# Altium PCB Copy of PDC_Rev_2.PcbDoc (part 3 of 3)
Units mil, origin at the board's own origin, x right, y up, seen from the top; angles counter-clockwise.
Board outline 5005 x 4200 mil, 4 copper layers (Top Layer, Signal_1, Signal_2, Bottom Layer), stack 23.756 mil thick; 184 components, 175 nets, 851 pads, 949 vias.
Unrouted connection lines stored in the file: 344.
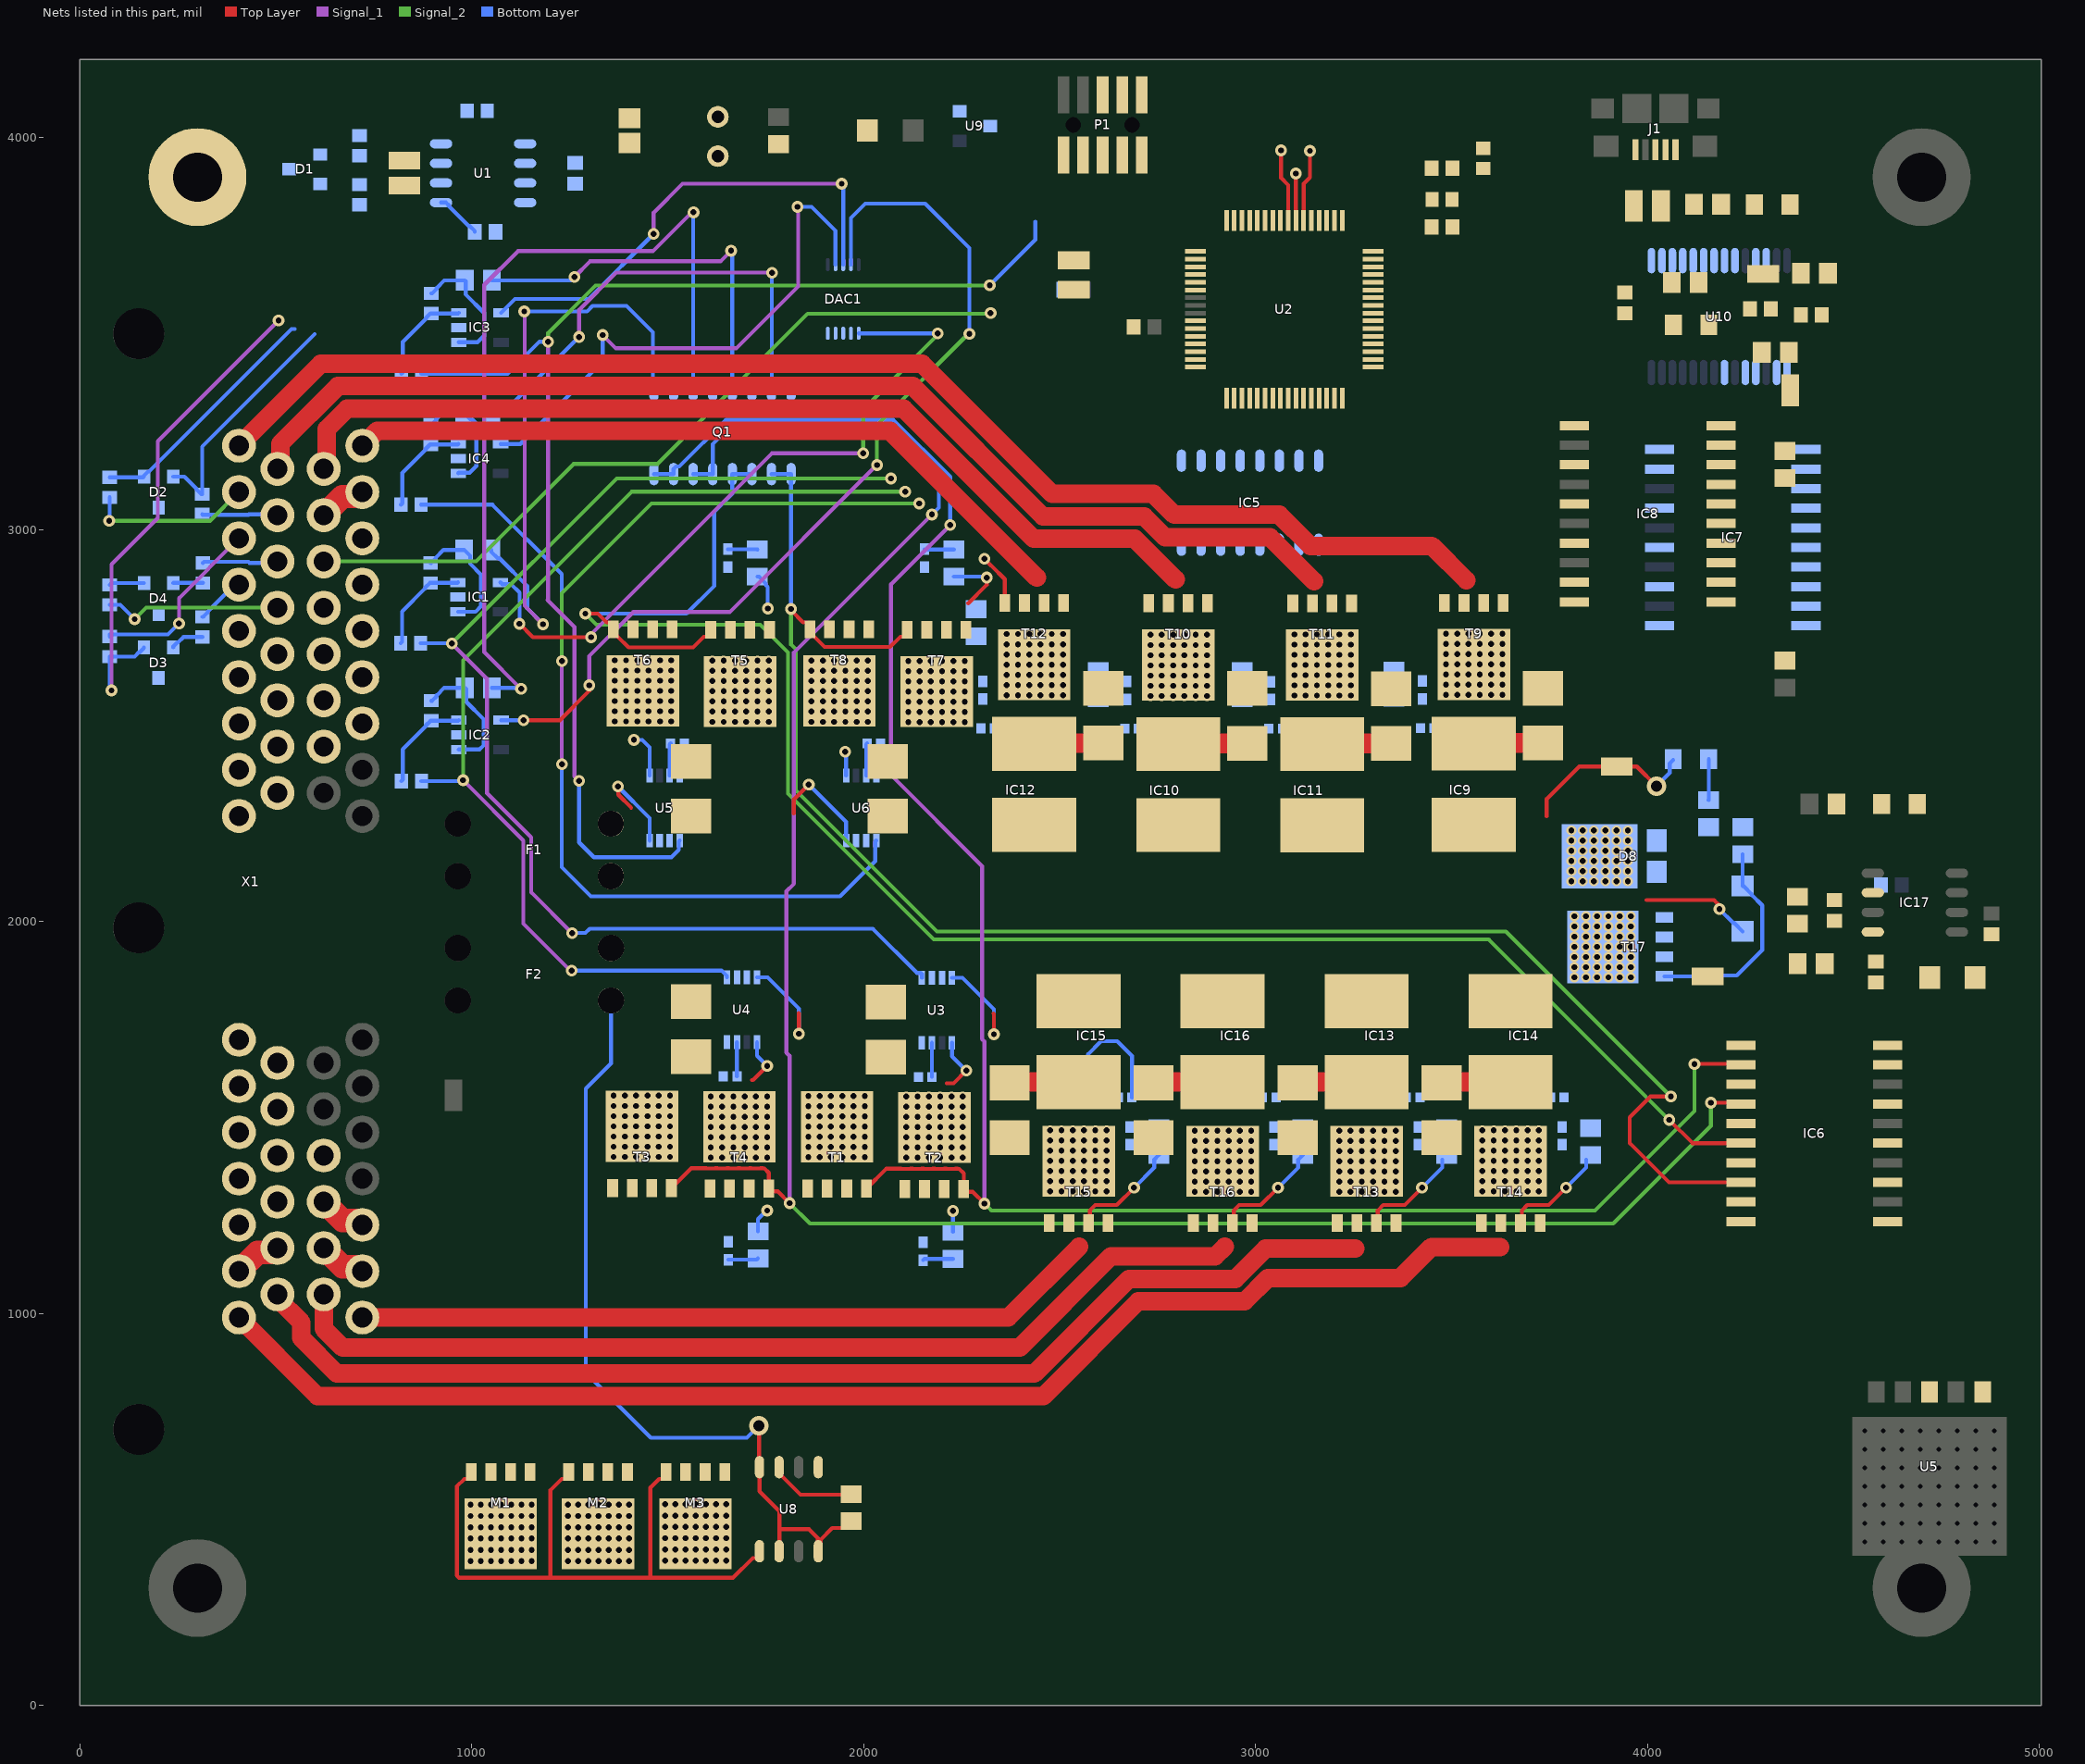
[diagram p4: the nets of this part, all layers, seen from the top]

## Via types
v1: diameter 25, hole 15, Top Layer to Bottom Layer, 876 vias
v2: diameter 30, hole 15, Top Layer to Bottom Layer, 71 vias
v3: diameter 50, hole 28, Top Layer to Bottom Layer, 2 vias

## Nets (pads, with @x,y where several pads share a name; then routed paths per layer and width w, separated by ;. In a path a pad name is that pad's centre, name@x,y a point inside that pad or via, vN(x,y) a via of type N, cw(c..) or ccw(c..) an arc to the next point about the centre after c; other vN are vias at no path point) (continued)
+12: "PTC Fuse1.2" "PTC Fuse2.2" "PTC Fuse3.2" "PTC Fuse4.2" "PTC Fuse5.2" "PTC Fuse6.2" "PTC Fuse7.2" "PTC Fuse8.2" C21.2 D5.1 D7.2 D8.3 F1.1 F2.1 IC6.11 IC6.13 IC6.15 IC6.17 IC6.19 IC6.20 IC7.11 IC7.13 IC7.15 IC7.17 IC7.19 IC7.20 IC8.11 IC8.13 IC8.15 IC8.17 IC8.19 IC8.20 IC17.2 LED2.1 PWR_OUT.1 R25.2 R28.2 R31.2 R34.2 R61.2 R64.1 T17.mb U3.8 U4.8 U5.8 U6.8 U8.4 U8.6 U8.8 | length 3888.1
  Top Layer w10: v2(1373,2345) 1374.21,2343.79 1374.21,2323.79 1407,2291 ; v3(1733,714) 1733,609.63 U8.4@1734.34,608.28 1734.34,546.66 1785,496 1785,450 ; U8.6@1784.34,393.72 1785,394.37 1785,450 ; 1822,2276 1822,2312 v2(1860,2350) ; 1834,1767 1835,1766 v2(1835,1714) ; R64.1@1968.34,470.55 1964.41,470.55 1946.77,452.91 1919.91,452.91 1890.64,423.64 1890.64,407.46 1884.34,401.17 U8.8@1884.34,393.72 1883.25,394.81 1883.25,427.27 1860.52,450 1785,450 ; 2331.48,1765.7 2332.48,1764.7 v2(2332.48,1712.7) ; 3743,2269 3743,2313 3826,2396 PWR_OUT.1@3922,2396 3973,2396 v3(4023,2346) ; 3998,2055 4170,2055 4184.36,2040.64 4184.36,2032.36 v2(4184,2032)
  Bottom Layer w10: F2.1@1355.28,1799.16 1355.28,1638.28 1291,1574 1291,849 1457,683 1702,683 v3(1733,714) ; v2(1373,2345) 1453.82,2264.18 U5.8@1453.82,2207.11 ; U4.8@1727.91,1858.19 1754.81,1858.19 1835,1778 v2(1835,1714) ; v2(1860,2350) 1955.26,2254.74 U6.8@1955.26,2207.11 ; U3.8@2225.39,1856.89 2252.28,1856.89 2332.48,1776.7 v2(2332.48,1712.7) ; v3(4023,2346) 4056.96,2379.96 4056.96,2403.71 LED2.1@4065.91,2412.65 ; v2(4184,2032) 4219.16,1996.84 4221.61,1996.84 D7.2@4243.18,1975.26
  other v1: 3814,1858 3842.8,1858 3871.6,1858 3900.4,1858 3929.2,1858 3958,1858 3814,1884 3842.8,1884 3871.6,1884 3900.4,1884 3929.2,1884 3958,1884 3814,1910 3842.8,1910 3871.6,1910 3900.4,1910 3929.2,1910 3958,1910 3814,1936 3842.8,1936 3871.6,1936 3900.4,1936 3929.2,1936 3958,1936 3814,1962 3842.8,1962 3871.6,1962 3900.4,1962 3929.2,1962 3958,1962 3814,1988 3842.8,1988 3871.6,1988 3900.4,1988 3929.2,1988 3958,1988 3814,2014 3842.8,2014 3871.6,2014 3900.4,2014 3929.2,2014 3958,2014 3806,2103 3834.8,2103 3863.6,2103 3892.4,2103 3921.2,2103 3950,2103 3806,2129 3834.8,2129 3863.6,2129 3892.4,2129 3921.2,2129 3950,2129 3806,2155 3834.8,2155 3863.6,2155 3892.4,2155 3921.2,2155 3950,2155 3806,2181 3834.8,2181 3863.6,2181 3892.4,2181 3921.2,2181 3950,2181 3806,2207 3834.8,2207 3863.6,2207 3892.4,2207 3921.2,2207 3950,2207 3806,2233 3834.8,2233 3863.6,2233 3892.4,2233 3921.2,2233 3950,2233
BAT_SENSE: R61.1 R62.2 U2.3
CAN_N: D1.2 R13.1 TEST_CANN1.1 U1.6 X1.A31
CAN_P: D1.1 R14.2 TEST_CANP1.1 U1.7 X1.A30
CS: DAC1.10 U2.34
D_IN_1: R18.2 X1.A29 | length 128.3
  Bottom Layer w10: R18.2@313,2777.59 314.97,2777.59 326.7,2789.32 326.7,2791.29 395.65,2860.24 X1.A29@405.91,2860.24
D_IN_2: R20.2 X1.A21 | length 455.5
  Signal_2 w10: v2(140,2772) 169.18,2801.18 X1.A21@504.33,2801.18
  Bottom Layer w10: R20.2@76,2808.41 103.59,2808.41 v2(140,2772)
D_IN_3: R17.2 X1.A20 | length 194.3
  Bottom Layer w10: R17.2@314,2915.59 316.95,2918.54 430.06,2918.54 433.01,2915.59 500.63,2915.59 X1.A20@504.33,2919.29
D_N: J1.2 TEST_USBD_N1.1 U10.16
D_OUT_1: D2.1 R22.1 U2.57 | length 630.5
  Bottom Layer w10: R22.1@76,3134 161.99,3134 D2.1@163.77,3135.78 163.77,3137.75 174.51,3148.5 176.48,3148.5 540.35,3512.36 548.64,3512.36
D_OUT_2: D2.2 R19.1 U2.59 | length 620.6
  Bottom Layer w10: D2.2@238.57,3135.78 266.81,3135.78 298.3,3104.29 298.3,3102.32 310.03,3090.59 R19.1@312,3090.59 312,3212 599,3499
D_OUT_3: D3.1 R21.1 U2.60 | length 1307.8
  Signal_1 w10: v2(81,2590) 81,2912 199,3030 199,3226 v2(507,3534)
  Bottom Layer w10: v2(81,2590) 75.83,2595.17 R21.1@75.83,2676.41 139.82,2676.41 150.88,2687.47 152.85,2687.47 163.6,2698.22 D3.1@163.6,2700.19
D_OUT_4: D3.2 R18.1 | length 86.6
  Bottom Layer w10: D3.2@238.4,2700.19 238.4,2702.16 249.15,2712.9 251.12,2712.9 264.62,2726.41 R18.1@313,2726.41
D_OUT_5: D4.1 R20.1 | length 89.5
  Bottom Layer w10: R20.1@76,2859.59 80.15,2863.74 D4.1@163.77,2863.74
D_OUT_6: D4.2 R17.1 | length 75.7
  Bottom Layer w10: D4.2@238.57,2863.74 239.24,2864.41 R17.1@314,2864.41
D_P: J1.3 TEST_USBD_P1.1 U10.15
DGND: C1.1 C2.1 C3.1 C4.1 C5.1 C6.1 C7.1 C8.1 C9.1 C10.1 C11.1 C12.1 C13.1 C14.1 C15.1 C16.1 C17.1 C18.1 C19.1 C20.1 C21.1 C22.1 C23.1 C25.1 C26.1 D1.3 D2.3 D3.3 D4.3 D8.1 D8.2 DAC1.7 IC1.2 IC2.2 IC3.2 IC4.2 IC6.1 IC6.10 IC7.1 IC7.10 IC8.1 IC8.10 IC9.4 IC9.7 IC10.4 IC10.7 IC11.4 IC11.7 IC12.4 IC12.7 IC13.4 IC13.7 IC14.4 IC14.7 IC15.4 IC15.7 IC16.4 IC16.7 IC17.4 J1.5 LED1.2 P1.3 P1.5 pad.1@300,3900 Q1.10 Q1.12 Q1.14 Q1.16 R15.1 R27.1 R30.1 R33.1 R36.1 R39.1 R42.1 R45.1 R48.1 R51.1 R54.1 R57.1 R60.1 R62.1 R66.1 R67.1 T17.1 T17.2 T17.3 U1.2 U2.10 U2.40 U3.4 U3.6 U3.7 U4.4 U4.6 U4.7 U5.3@4719.87,800.39 U5.4@1530.59,2372.89 U5.6@1505,2207.11 U5.7 U6.4 U6.6 U6.7 U8.1 U9.3 U10.7 U10.18 U10.21 U10.25 U10.26 W1.1 X1.A5 X1.A6 X1.A7 X1.A13 X1.A14 X1.A15 X1.A16 X1.A22 X1.A23 X1.A24 X1.A25 X1.A32 X1.A33 X1.A34 X1.B10 X1.B14 X1.B15 X1.B16 X1.B20 X1.B21 X1.B22 X1.B23
DVCC: C3.2 C5.2 C25.2 P1.1 R23.2 R24.2 U2.41 U10.4 U10.19 U10.20
DVCC_5V: J1.1 R70.2 R71.2
EMERGENCY_SHUTDOWN: R?.2 X1.A12 | length 1964
  Signal_2 w10: X1.A12@622.44,2919.29 1011.29,2919.29 1260,3168 1474,3168 1857,3551 2322,3551 v2(2324,3553)
FTDI_GREEN: D9.2 U10.23
FTDI_RED: D10.2 U10.22
FTDI_RX: R69.2 U2.47
FTDI_TX: R68.2 U2.48
HC1_ANALOG_BACKUP_REF: DAC1.2 IC4.4 | length 1406.1
  Signal_1 w10: v2(1334,3497) 1368,3463 1675,3463 1833,3621 1833,3822 v2(1831,3824)
  Bottom Layer w10: IC4.4@1074,3219 1124,3219 1334,3429 v2(1334,3497) ; v2(1831,3824) 1867,3824 1928.31,3762.69 DAC1.2@1928.31,3676.6
HC1_EN: IC5.16 U2.24
HC1_GATE: IC6.18 Q1.1 Q1.2 T7.4 T8.4 | length 4309.3
  Top Layer w10: v2(1815,2798) 1815,2794.26 1845.32,2763.94 1854.18,2763.94 1862.96,2755.16 T8.4@1862.96,2746.3 1862.96,2737.44 1871.74,2728.66 1872.97,2728.66 1900.63,2701 2067.36,2701 2093.72,2727.36 2102.58,2727.36 2111.36,2736.14 T7.4@2111.36,2745 ; v2(4060,1554) 4008,1554 3955,1501 3955,1435 4055,1335 IC6.18@4238.99,1335
  Signal_2 w10: v2(1815,2798) 1815,2707.28 1827,2695.28 1827,2335.28 2187.28,1975 3639,1975 v2(4060,1554)
  Bottom Layer w10: Q1.2@1765,3142.07 Q1.1@1815,3142.07 v2(1815,2798)
HC1_ISENSE_ADC: R12.1 U2.46 U6.5 | length 3281.6
  Signal_1 w10: v2(1230,2402) v2(1230,2665)
  Signal_2 w10: v2(1230,2665) 1230,2838 1459,3067 v2(2142,3067)
  Bottom Layer w10: R12.1@870.46,3064 1053,3064 1230,2887 v2(1230,2665) ; v2(1230,2402) 1230,2139 1304,2065 1940,2065 2029.7,2154.7 2029.7,2204.78 U6.5@2032.03,2207.11
HC1_VSENSE_ADC: R35.1 R36.2 U2.43 | length 75.7
  Bottom Layer w10: R36.2@2155.15,2950.28 2155.97,2949.45 R35.1@2230.5,2949.45
HC2_ANALOG_BACKUP_REF: DAC1.3 IC3.4 | length 1245.1
  Signal_1 w10: v2(1464,3755) 1464,3809 1538,3883 v2(1944,3883)
  Bottom Layer w10: IC3.4@1075.13,3553.4 1110.73,3589 1298,3589 v2(1464,3755) ; v2(1944,3883) 1948,3879 DAC1.3@1948,3676.6
HC2_EN: IC5.14 U2.23
HC2_GATE: IC6.16 Q1.3 Q1.4 T5.4 T6.4 | length 4821.8
  Top Layer w10: v2(1290,2786) 1321.82,2786 1343.89,2763.94 1352.74,2763.94 1361.52,2755.16 T6.4@1361.52,2746.3 1361.52,2737.44 1370.3,2728.66 1371.53,2728.66 1400.19,2700 1564.92,2700 1592.28,2727.36 1601.14,2727.36 1609.92,2736.14 T5.4@1609.92,2745 ; v2(4055.5,1494.5) 4115,1435 IC6.16@4238.99,1435
  Signal_2 w10: v2(1290,2786) 1318,2758 1736,2758 1807,2687 1807,2327 2179,1955 3595,1955 v2(4055.5,1494.5)
  Bottom Layer w10: v2(1290,2786) 1548,2786 1619,2857 1619,3046 1665,3092 Q1.4@1665,3142.07 Q1.3@1715,3142.07
HC2_ISENSE_ADC: R9.1 U2.52 U5.5@1530.59,2207.11 | length 3385.2
  Signal_1 w10: v2(1195,3480) 1195,2823 1193,2821 1262,2752 1262,2371 v2(1274,2359)
  Signal_2 w10: v2(1195,3480) 1195,3502 1316,3623 v2@2323,3623 ; v2(2322,3624) v2@2323,3623 ; v2@2325,3623 v2@2323,3623
  Bottom Layer w10: R9.1@871.59,3398.4 1091.4,3398.4 1173,3480 v2(1195,3480) ; v2(1274,2359) 1274,2202.28 1311.68,2164.61 1509.48,2164.61 1528.27,2183.39 1528.27,2204.78 U5.5@1530.59,2207.11 ; v2(2322,3624) 2438,3740 2438,3786
HC2_VSENSE_ADC: R32.1 R33.2 U2.42 | length 75.7
  Bottom Layer w10: R33.2@1653.71,2950.28 1728.24,2950.28 R32.1@1729.07,2949.45
HC3_ANALOG_BACKUP_REF: DAC1.4 IC2.4 | length 2417.4
  Top Layer w10: v2(1132,2514) 1225,2514 1299.75,2588.75 v2(1299.75,2603)
  Signal_1 w10: v2(1299.75,2603) 1299.75,2677.75 1412,2790 1658,2790 2033,3165 v2(2034,3165)
  Signal_2 w10: v2(2034,3165) 2034,3267 2267,3500 v2(2270,3500)
  Bottom Layer w10: IC2.4@1075.13,2514 v2(1132,2514) ; DAC1.4@1967.68,3676.6 1967.68,3795.69 2004,3832 2157,3832 2270,3719 v2(2270,3500)
HC3_EN: IC5.12 U2.22
HC3_GATE: IC6.14 Q1.5 Q1.6 T3.4 T4.4 | length 5765.8
  Top Layer w10: T3.4@1509.6,1320.3 1560.23,1370.93 1598.18,1370.93 1598.61,1370.5 1621.39,1370.5 1621.82,1370.93 1626.98,1370.93 1627.41,1370.5 1650.19,1370.5 1650.62,1370.93 1655.78,1370.93 1656.21,1370.5 1678.99,1370.5 1679.42,1370.93 1684.58,1370.93 1685.01,1370.5 1707.79,1370.5 1708.22,1370.93 1713.38,1370.93 1713.81,1370.5 1736.59,1370.5 1737.02,1370.93 1742.18,1370.93 1742.61,1370.5 1746.74,1370.5 1758,1359.24 T4.4@1758,1319 1764.92,1312.08 1780.92,1312.08 v2(1811,1282) ; v2(4162,1538) 4235.99,1538 IC6.14@4238.99,1535
  Signal_1 w10: v2(1811,1282) 1811,1658 1803,1666 1803,2078 1822,2097 1822,2686.8 v2(2174.2,3039)
  Signal_2 w10: v2(1811,1282) 1863,1230 3913,1230 4162,1479 v2(4162,1538)
  Bottom Layer w10: Q1.6@1565,3142.07 Q1.5@1615,3142.07 1615,3218.43 1648.28,3251.72 2050.28,3251.72 2192,3110 2192,3056.8 v2(2174.2,3039)
HC3_ISENSE_ADC: R6.1 U2.51 U4.5 | length 2727
  Signal_1 w10: v2(978,2361) 1132,2207 1132,1995 1252,1875 v2(1255,1875)
  Signal_2 w10: v2(978,2361) 978,2667 1408,3097 v2(2106,3097)
  Bottom Layer w10: R6.1@871.59,2359 976,2359 v2(978,2361) ; v2(1255,1875) 1637.87,1875 1651.14,1861.73 U4.5@1651.14,1858.19
HC3_VSENSE_ADC: R29.1 R30.2 U2.55 | length 197.2
  Top Layer w10: U2.55@3103.15,3789.02 v2(3103.15,3909)
  Bottom Layer w10: R30.2@1654.52,1137.66 1727.27,1137.66 R29.1@1730.46,1140.85
HC4_ANALOG_BACKUP_REF: DAC1.6 IC1.4 | length 1817.4
  Top Layer w10: v2(1122,2760) 1156,2726 v2(1305,2726)
  Signal_1 w10: v2(1305,2726) 1305,2734 1766,3195 v2(1999,3195)
  Signal_2 w10: v2(1999,3195) 1999,3307 2191,3499 v2(2189,3501)
  Bottom Layer w10: IC1.4@1073.27,2865.8 1078.16,2860.91 1101.09,2860.91 1122,2840 v2(1122,2760) ; DAC1.6@1987.61,3501.4 1988.01,3501 v2(2189,3501)
HC4_EN: IC5.10 U2.19
HC4_GATE: IC6.12 Q1.7 Q1.8 T1.4 T2.4 | length 5445.1
  Top Layer w10: T1.4@2007.08,1319 2057.71,1369.63 2095.66,1369.63 2096.09,1369.2 2118.87,1369.2 2119.3,1369.63 2124.46,1369.63 2124.89,1369.2 2147.67,1369.2 2148.1,1369.63 2153.26,1369.63 2153.69,1369.2 2176.47,1369.2 2176.9,1369.63 2182.06,1369.63 2182.49,1369.2 2205.27,1369.2 2205.7,1369.63 2210.86,1369.63 2211.29,1369.2 2234.07,1369.2 2234.5,1369.63 2239.66,1369.63 2240.09,1369.2 2244.21,1369.2 2255.48,1357.94 T2.4@2255.48,1317.7 2262.4,1310.78 2278.4,1310.78 v2(2308.48,1280.7) ; v2(4120,1637) 4236.99,1637 IC6.12@4238.99,1635
  Signal_1 w10: v2(2221,3012) 2070,2861 2070,2374 2302.48,2141.52 2302.48,1700.27 2308.48,1694.27 v2(2308.48,1280.7)
  Signal_2 w10: v2(2308.48,1280.7) 2326.18,1263 3866.43,1263 4120,1516.57 v2(4120,1637)
  Bottom Layer w10: Q1.8@1465,3142.07 Q1.7@1515,3142.07 1515,3155.11 1521.29,3161.41 1529.69,3161.41 1648.28,3280 2076,3280 2221,3135 v2(2221,3012)
HC4_ISENSE_ADC: R3.1 U2.45 U3.5 | length 3195.6
  Signal_1 w10: v2(949,2710) 1039,2620 1039,2328.28 1152,2215.28 1152,2075 v2(1256,1971)
  Signal_2 w10: v2(949,2710) 1370,3131 v2(2070,3131)
  Bottom Layer w10: R3.1@869.72,2710.8 948.2,2710.8 v2(949,2710) ; v2(1256,1971) 1256.14,1971.14 1290.14,1971.14 1301,1982 2023.51,1982 2136.11,1869.39 2145.35,1869.39 2148.61,1866.13 U3.5@2148.61,1856.89
HC4_VSENSE_ADC: R26.1 R27.2 U2.56 | length 263.9
  Top Layer w10: v2(3065,3968) 3065,3898 3083.46,3879.54 U2.56@3083.46,3789.02
  Bottom Layer w10: R27.2@2152,1136.36 2155.19,1139.55 R26.1@2227.93,1139.55
HC_1_OUTPUT: R35.2 T7.1 T7.2 T7.3 T8.1 T8.2 T8.3 X1.A2 X1.A11 | length 292.5
  Top Layer w10: 2267,2812.42 2314,2859.42 v2(2314,2878)
  Top Layer w60: X1.A11@622.44,3037.4 669.95,3084.91 709.32,3084.91 X1.A2@720.87,3096.46
  Bottom Layer w10: R35.2@2230.5,2880.55 2311.45,2880.55 v2(2314,2878)
HC_2_OUTPUT: R32.2 T5.1 T5.2 T5.3 T6.1 T6.2 T6.3 X1.A3 X1.A4 | length 94.5
  Bottom Layer w10: R32.2@1729.07,2880.55 1733,2880.55 1750.64,2862.91 1750.64,2858.98 1755.35,2854.27 v2(1755.35,2799.25)
HC_3_OUTPUT: R29.2 T3.1 T3.2 T3.3 T4.1 T4.2 T4.3 X1.B5 X1.B11 | length 187.3
  Top Layer w60: X1.B11@622.44,1285.43 669.95,1237.92 709.32,1237.92 X1.B5@720.87,1226.38
  Bottom Layer w10: R29.2@1730.46,1209.75 1730.14,1210.06 1730.14,1241.14 1752,1263 v2(1754,1263)
HC_4_OUTPUT: R26.2 T1.1 T1.2 T1.3 T2.1 T2.2 T2.3 X1.B6 X1.B12 | length 176.4
  Top Layer w60: X1.B12@622.44,1167.32 669.95,1119.81 709.32,1119.81 X1.B6@720.87,1108.27
  Bottom Layer w10: R26.2@2227.93,1208.45 v2(2227.93,1262)
JTAG_RST: C23.2 C24.2 D6.1 P1.10 R24.1 R65.1 U2.63 W1.2
JTAG_TCLK: P1.4 U2.62
JTAG_TDI: P1.8 U2.61
JTAG_TDO: P1.6 U2.58
JTAG_TMS: P1.2 R23.1 U2.64
LC1_EN: IC8.3 U2.16
LC1_GATE: IC8.18 T16.4
LC2_EN: IC8.5 U2.15
LC2_GATE: IC8.16 T15.4
LC3_EN: IC8.7 U2.14
LC3_GATE: IC8.14 T14.4
LC4_EN: IC8.9 U2.13
LC4_GATE: IC8.12 T13.4
LC5_EN: IC7.3 U2.12
LC5_GATE: IC7.18 T12.4 | length 134.9
  Top Layer w10: v2(2308,2926) 2326,2908 2326.43,2908 2360.27,2874.16 T12.4@2360.27,2813
LC6_EN: IC7.5 U2.11
LC6_GATE: IC7.16 T11.4
LC7_EN: IC7.7 U2.2
LC7_GATE: IC7.14 T10.4
LC8_EN: IC7.9 U2.1
LC8_GATE: IC7.12 T9.4
LC_1_ISENSE_ADC: IC16.5 U2.49
LC_1_OUTPUT: R59.2 T16.1 T16.2 T16.3 X1.B13 | length 2793.5
  Top Layer w10: T16.3@2941.22,1231.47 2944.67,1234.92 2944.67,1263.25 2958.42,1277 3013.27,1277 v2(3057.42,1321.15)
  Top Layer w47.24: X1.B13@622.44,1049.21 622.44,961.62 670.83,913.23 2398.03,913.23 2630.8,1146 2897,1146 2922,1171
  Bottom Layer w10: v2(3057.42,1321.15) 3109.04,1372.77 3109.04,1392.97 R59.2@3120.62,1404.55
LC_1_VSENSE_ADC: R59.1 R60.2 U2.25
LC_2_ISENSE_ADC: IC15.5 U2.38
LC_2_OUTPUT: R56.2 T15.1 T15.2 T15.3 X1.B7 | length 2183.6
  Top Layer w10: T15.3@2573.8,1231.47 2577.25,1234.92 2577.25,1263.25 2591,1277 2645.85,1277 v2(2690,1321.15)
  Top Layer w47.24: X1.B7@720.87,990.16 2369.18,990.16 2550.02,1171
  Bottom Layer w10: v2(2690,1321.15) 2741.62,1372.77 2741.62,1392.97 R56.2@2753.2,1404.55
LC_2_VSENSE_ADC: R56.1 R57.2 U2.21
LC_3_ISENSE_ADC: IC14.5 U2.37
LC_3_OUTPUT: R53.2 T14.1 T14.2 T14.3 X1.B26 | length 3721.8
  Top Layer w10: T14.3@3676.06,1231.47 3679.51,1234.92 3679.51,1263.25 3693.26,1277 3748.11,1277 v2(3792.26,1321.15)
  Top Layer w47.24: X1.B26@405.91,990.16 606.31,789.76 2459.24,789.76 2701,1031.51 2972.47,1031.51 3031.96,1091 3370,1091 3449,1170 3624,1170
  Bottom Layer w10: v2(3792.26,1321.15) 3843.88,1372.77 R53.2@3843.88,1392.97
LC_3_VSENSE_ADC: R53.1 R54.2 U2.20
LC_4_ISENSE_ADC: IC13.5 U2.54 | length 184.7
  Top Layer w10: U2.54@3122.83,3789.02 3122.83,3882.83 3139,3899 v2(3139,3967)
LC_4_OUTPUT: R50.2 T13.1 T13.2 T13.3 X1.B19 | length 3259.3
  Top Layer w10: T13.3@3308.64,1231.47 3312.09,1234.92 3312.09,1263.25 3325.84,1277 3380.69,1277 v2(3424.84,1321.15)
  Top Layer w47.24: X1.B19@504.33,1049.21 504.33,1038.56 565.2,977.69 565.2,937.91 656.1,847 2435.53,847 2677.29,1088.76 2948.76,1088.76 3026,1166 3255,1166
  Bottom Layer w10: v2(3424.84,1321.15) 3476.46,1372.77 R50.2@3476.46,1392.97
LC_4_VSENSE_ADC: R50.1 R51.2 U2.30
LC_5_ISENSE_ADC: IC12.5 U2.36
LC_5_OUTPUT: R47.2 T12.1 T12.2 T12.3 X1.A1 | length 1891.7
  Top Layer w47.24: X1.A1@720.87,3214.57 758.3,3252 2067.73,3252 2442,2877.73
LC_5_VSENSE_ADC: R47.1 R48.2 U2.29
LC_6_ISENSE_ADC: IC11.5 U2.53
LC_6_OUTPUT: R44.2 T11.1 T11.2 T11.3 X1.A18 | length 2971.4
  Top Layer w47.24: X1.A18@504.33,3155.51 511.86,3163.04 511.86,3219.82 658.53,3366.49 2125.47,3366.49 2457.71,3034.24 2715.71,3034.24 2768.96,2981 3037,2981 3149,2869
LC_6_VSENSE_ADC: R44.1 R45.2 U2.28
LC_7_ISENSE_ADC: IC10.5 U2.31
LC_7_OUTPUT: R41.2 T10.1 T10.2 T10.3 X1.A10 | length 2473
  Top Layer w47.24: X1.A10@622.44,3155.51 629.97,3163.04 629.97,3256.97 682.24,3309.24 2101.76,3309.24 2434,2977 2692,2977 2796,2873
LC_7_VSENSE_ADC: R41.1 R42.2 U2.27
LC_8_ISENSE_ADC: IC9.5 U2.26
LC_8_OUTPUT: R38.2 T9.1 T9.2 T9.3 X1.A26 | length 3447.7
  Top Layer w47.24: X1.A26@405.91,3214.57 615.07,3423.73 2149.18,3423.73 2481.42,3091.49 2739.42,3091.49 2792.67,3038.24 3060.71,3038.24 3139.96,2959 3450,2959 3538,2871
LC_8_VSENSE_ADC: R38.1 R39.2 U2.50
MOSI: DAC1.8 U2.33
NetC7_2: C7.2 U3.3 | length 87.2
  Bottom Layer w10: U3.3@2174.2,1691.11 2174.2,1604.12 C7.2@2174.32,1604
NetC8_2: C8.2 U4.3 | length 87.2
  Bottom Layer w10: U4.3@1676.73,1692.41 1676.73,1605.42 C8.2@1676.85,1605.3
NetC9_2: C9.2 U5.3@1505,2372.89 | length 83.2
  Bottom Layer w10: U5.3@1505,2372.89 1505,2452.32 C9.2@1507.68,2455
NetC10_2: C10.2 U6.3 | length 83.2
  Bottom Layer w10: U6.3@2006.44,2372.89 2006.44,2452.32 C10.2@2009.11,2455
NetC11_2: C11.2 IC9.3
NetC12_2: C12.2 IC10.3
NetC13_2: C13.2 IC11.3
NetC14_2: C14.2 IC12.3
NetC15_2: C15.2 IC13.3
NetC16_2: C16.2 IC14.3
NetC17_2: C17.2 IC15.3 | length 284.4
  Bottom Layer w10: IC15.3@2569.7,1626.11 2572.02,1628.43 2572.02,1661.27 2605.75,1695 2647,1695 2684.81,1657.19 C17.2@2684.81,1551.35
NetC18_2: C18.2 IC16.3
NetC20_2: C20.2 D5.2 U5.1@4855.3,800.39
NetC24_1: C24.1 U10.2
NetD7_1: D7.1 OVP_G.1 R66.2 T17.4 | length 543.4
  Bottom Layer w10: T17.4@4043.58,1860.73 OVP_G.1@4153.62,1860.73 4155.89,1863 4228,1863 4293,1928 4293,2041.59 4266.73,2067.86 4266.73,2069.83 4245.15,2091.41 D7.1@4243.18,2091.41 4242.97,2091.62 R66.2@4242.97,2172.28
NetD9_1: D9.1 R70.1
NetD10_1: D10.1 R71.1
NetIC1_1: IC1.1 R1.2 R2.1 | length 325.9
  Bottom Layer w10: R1.2@894.95,2915.59 896.92,2915.59 908.65,2927.32 908.65,2929.29 928.01,2948.65 R2.1@980.55,2948.65 995.66,2933.53 995.66,2913.34 1023,2886 1023,2804.29 1009.71,2791 IC1.1@965,2791
NetIC1_3: IC1.3 R1.1 R3.2 | length 257
  Bottom Layer w10: R3.2@818.54,2710.8 822.13,2714.39 822.13,2791.59 881.25,2850.71 881.25,2852.68 892.98,2864.41 R1.1@894.95,2864.41 963.61,2864.41 IC1.3@965,2865.8
NetIC2_1: IC2.1 R4.2 R5.1 | length 334.7
  Bottom Layer w10: R4.2@896.82,2563.79 898.79,2563.79 910.52,2575.52 910.52,2577.49 929.87,2596.84 R5.1@982.42,2596.84 985.87,2593.39 985.87,2561.13 1030,2517 1030,2449.79 1020,2439.79 967.46,2439.79 IC2.1@966.87,2439.2
NetIC2_3: IC2.3 R4.1 R6.2 | length 257
  Bottom Layer w10: R6.2@820.41,2359 824,2362.59 824,2439.79 883.12,2498.91 883.12,2500.87 894.85,2512.61 R4.1@896.82,2512.61 965.47,2512.61 IC2.3@966.87,2514
NetIC3_1: IC3.1 R7.2 R8.1 | length 333.6
  Bottom Layer w10: R7.2@896.82,3603.19 898.79,3603.19 910.52,3614.92 910.52,3616.89 929.87,3636.25 R8.1@982.42,3636.25 984.47,3634.19 984.47,3600.53 1032,3553 1032,3496 1014.6,3478.6 IC3.1@966.87,3478.6
NetIC3_3: IC3.3 R7.1 R9.2 | length 257
  Bottom Layer w10: R9.2@820.41,3398.4 824,3401.99 824,3479.19 883.12,3538.31 883.12,3540.28 894.85,3552.01 R7.1@896.82,3552.01 965.47,3552.01 IC3.3@966.87,3553.4
NetIC4_1: IC4.1 R10.2 R11.1 | length 308.4
  Bottom Layer w10: R10.2@895.68,3268.79 897.65,3268.79 909.38,3280.52 909.38,3282.49 928.74,3301.84 R11.1@981.28,3301.84 981.28,3297.91 998.92,3280.27 1002.86,3280.27 1012,3271.13 1012,3163 994.56,3145.56 967.09,3145.56 IC4.1@965.73,3144.2
NetIC4_3: IC4.3 R10.1 R12.2 | length 257
  Bottom Layer w10: R12.2@819.28,3064 822.87,3067.59 822.87,3144.79 881.98,3203.91 881.98,3205.87 893.71,3217.61 R10.1@895.68,3217.61 964.34,3217.61 IC4.3@965.73,3219
NetIC5_1: IC5.1 IC5.2 IC6.3
NetIC5_3: IC5.3 IC5.4 IC6.5
NetIC5_5: IC5.5 IC5.6 IC6.7
NetIC5_7: IC5.7 IC5.8 IC6.9
NetIC5_9: IC5.9 IC5.11 IC5.13 IC5.15 R16.1 R?.1
NetIC9_1: IC9.1 R37.1 T9.mb
  other v1: 3486,2579 3514.8,2579 3543.6,2579 3572.4,2579 3601.2,2579 3630,2579 3486,2605 3514.8,2605 3543.6,2605 3572.4,2605 3601.2,2605 3630,2605 3486,2631 3514.8,2631 3543.6,2631 3572.4,2631 3601.2,2631 3630,2631 3486,2657 3514.8,2657 3543.6,2657 3572.4,2657 3601.2,2657 3630,2657 3486,2683 3514.8,2683 3543.6,2683 3572.4,2683 3601.2,2683 3630,2683 3486,2709 3514.8,2709 3543.6,2709 3572.4,2709 3601.2,2709 3630,2709 3486,2735 3514.8,2735 3543.6,2735 3572.4,2735 3601.2,2735 3630,2735
NetIC9_8: "PTC Fuse1.1" IC9.8 R37.2 | length 174.1
  Top Layer w50: 3559.28,2456.22 R37.2@3733.39,2456.22
NetIC10_1: IC10.1 R40.1 T10.mb
  other v1: 2732,2576 2760.8,2576 2789.6,2576 2818.4,2576 2847.2,2576 2876,2576 2732,2602 2760.8,2602 2789.6,2602 2818.4,2602 2847.2,2602 2876,2602 2732,2628 2760.8,2628 2789.6,2628 2818.4,2628 2847.2,2628 2876,2628 2732,2654 2760.8,2654 2789.6,2654 2818.4,2654 2847.2,2654 2876,2654 2732,2680 2760.8,2680 2789.6,2680 2818.4,2680 2847.2,2680 2876,2680 2732,2706 2760.8,2706 2789.6,2706 2818.4,2706 2847.2,2706 2876,2706 2732,2732 2760.8,2732 2789.6,2732 2818.4,2732 2847.2,2732 2876,2732
NetIC10_8: "PTC Fuse2.1" IC10.8 R40.2 | length 174.1
  Top Layer w50: 2804.9,2455.12 R40.2@2979,2455.12
NetIC11_1: IC11.1 R43.1 T11.mb
  other v1: 3099,2577 3127.8,2577 3156.6,2577 3185.4,2577 3214.2,2577 3243,2577 3099,2603 3127.8,2603 3156.6,2603 3185.4,2603 3214.2,2603 3243,2603 3099,2629 3127.8,2629 3156.6,2629 3185.4,2629 3214.2,2629 3243,2629 3099,2655 3127.8,2655 3156.6,2655 3185.4,2655 3214.2,2655 3243,2655 3099,2681 3127.8,2681 3156.6,2681 3185.4,2681 3214.2,2681 3243,2681 3099,2707 3127.8,2707 3156.6,2707 3185.4,2707 3214.2,2707 3243,2707 3099,2733 3127.8,2733 3156.6,2733 3185.4,2733 3214.2,2733 3243,2733
NetIC11_8: "PTC Fuse3.1" IC11.8 R43.2 | length 174.1
  Top Layer w50: 3172.32,2455.01 R43.2@3346.42,2455.01
NetIC12_1: IC12.1 R46.1 T12.mb
  other v1: 2365,2578 2393.8,2578 2422.6,2578 2451.4,2578 2480.2,2578 2509,2578 2365,2604 2393.8,2604 2422.6,2604 2451.4,2604 2480.2,2604 2509,2604 2365,2630 2393.8,2630 2422.6,2630 2451.4,2630 2480.2,2630 2509,2630 2365,2656 2393.8,2656 2422.6,2656 2451.4,2656 2480.2,2656 2509,2656 2365,2682 2393.8,2682 2422.6,2682 2451.4,2682 2480.2,2682 2509,2682 2365,2708 2393.8,2708 2422.6,2708 2451.4,2708 2480.2,2708 2509,2708 2365,2734 2393.8,2734 2422.6,2734 2451.4,2734 2480.2,2734 2509,2734
NetIC12_8: "PTC Fuse4.1" IC12.8 R46.2 | length 176.9
  Top Layer w10: 2435.47,2453.58 2437.47,2455.59
  Top Layer w50: 2437.47,2455.59 R46.2@2611.58,2455.59
NetIC13_1: IC13.1 R49.1 T13.mb
  other v1: 3213.64,1311 3242.44,1311 3271.24,1311 3300.04,1311 3328.84,1311 3357.64,1311 3213.64,1337 3242.44,1337 3271.24,1337 3300.04,1337 3328.84,1337 3357.64,1337 3213.64,1363 3242.44,1363 3271.24,1363 3300.04,1363 3328.84,1363 3357.64,1363 3213.64,1389 3242.44,1389 3271.24,1389 3300.04,1389 3328.84,1389 3357.64,1389 3213.64,1415 3242.44,1415 3271.24,1415 3300.04,1415 3328.84,1415 3357.64,1415 3213.64,1441 3242.44,1441 3271.24,1441 3300.04,1441 3328.84,1441 3357.64,1441 3213.64,1467 3242.44,1467 3271.24,1467 3300.04,1467 3328.84,1467 3357.64,1467
NetIC13_8: "PTC Fuse5.1" IC13.8 R49.2 | length 174.1
  Top Layer w50: R49.2@3109.34,1590.89 3283.45,1590.89
NetIC14_1: IC14.1 R52.1 T14.mb
  other v1: 3579,1312 3607.8,1312 3636.6,1312 3665.4,1312 3694.2,1312 3723,1312 3579,1338 3607.8,1338 3636.6,1338 3665.4,1338 3694.2,1338 3723,1338 3579,1364 3607.8,1364 3636.6,1364 3665.4,1364 3694.2,1364 3723,1364 3579,1390 3607.8,1390 3636.6,1390 3665.4,1390 3694.2,1390 3723,1390 3579,1416 3607.8,1416 3636.6,1416 3665.4,1416 3694.2,1416 3723,1416 3579,1442 3607.8,1442 3636.6,1442 3665.4,1442 3694.2,1442 3723,1442 3579,1468 3607.8,1468 3636.6,1468 3665.4,1468 3694.2,1468 3723,1468
NetIC14_8: "PTC Fuse6.1" IC14.8 R52.2 | length 174.1
  Top Layer w50: R52.2@3476.76,1590.89 3650.87,1590.89
NetIC15_1: IC15.1 R55.1 T15.mb
  other v1: 2476,1312 2504.8,1312 2533.6,1312 2562.4,1312 2591.2,1312 2620,1312 2476,1338 2504.8,1338 2533.6,1338 2562.4,1338 2591.2,1338 2620,1338 2476,1364 2504.8,1364 2533.6,1364 2562.4,1364 2591.2,1364 2620,1364 2476,1390 2504.8,1390 2533.6,1390 2562.4,1390 2591.2,1390 2620,1390 2476,1416 2504.8,1416 2533.6,1416 2562.4,1416 2591.2,1416 2620,1416 2476,1442 2504.8,1442 2533.6,1442 2562.4,1442 2591.2,1442 2620,1442 2476,1468 2504.8,1468 2533.6,1468 2562.4,1468 2591.2,1468 2620,1468
NetIC15_8: "PTC Fuse7.1" IC15.8 R55.2 | length 174.1
  Top Layer w50: R55.2@2374.5,1590.89 2548.6,1590.89
NetIC16_1: IC16.1 R58.1 T16.mb
  other v1: 2845,1311 2873.8,1311 2902.6,1311 2931.4,1311 2960.2,1311 2989,1311 2845,1337 2873.8,1337 2902.6,1337 2931.4,1337 2960.2,1337 2989,1337 2845,1363 2873.8,1363 2902.6,1363 2931.4,1363 2960.2,1363 2989,1363 2845,1389 2873.8,1389 2902.6,1389 2931.4,1389 2960.2,1389 2989,1389 2845,1415 2873.8,1415 2902.6,1415 2931.4,1415 2960.2,1415 2989,1415 2845,1441 2873.8,1441 2902.6,1441 2931.4,1441 2960.2,1441 2989,1441 2845,1467 2873.8,1467 2902.6,1467 2931.4,1467 2960.2,1467 2989,1467
NetIC16_8: "PTC Fuse8.1" IC16.8 R58.2 | length 174.1
  Top Layer w50: R58.2@2741.92,1590.89 2916.02,1590.89
NetLED1_1: LED1.1 R63.2
NetLED2_2: LED2.2 R67.2 | length 104.6
  Bottom Layer w10: R67.2@4156.18,2310.18 4156.46,2310.45 LED2.2@4156.46,2414.69
NetM1_4: M1.4 M2.4 M3.4 U8.5 | length 1680
  Top Layer w10: M1.4@999,596 999,587.14 990.22,578.36 981.36,578.36 962,559 962,331.86 967.86,326 1201,326 ; M2.4@1247.4,596 1247.4,587.14 1238.62,578.36 1229.76,578.36 1201,549.6 1201,326 ; M3.4@1495.79,596 1495.79,587.14 1487.01,578.36 1478.15,578.36 1456,556.21 1456,326 ; U8.5@1734.34,393.72 1734.34,382.68 1728.05,376.39 1717.02,376.39 1666.63,326 1456,326 ; 1201,326 1456,326
NetQ1_9: Q1.9 R2.2 | length 1574.9
  Signal_1 w10: v2(1134,3557) 1135,3556 1135,2806 v2(1182,2759)
  Bottom Layer w10: R2.2@1049.45,2948.65 1049.45,2944.71 1067.09,2927.07 1071.02,2927.07 1142,2856.1 1142,2799 v2(1182,2759) ; v2(1134,3557) 1294.28,3557 1308.28,3571 1395,3571 1462,3504 1462,3386 1462.39,3385.61 1462.39,3359.24 Q1.9@1465,3356.64
NetQ1_11: Q1.11 R5.2 | length 2219.1
  Signal_1 w10: v2(1126,2594) 1032,2688 1032,3625 1118,3711 1462.43,3711 v2@1566,3814.57 ; v2(1566,3810) v2@1566,3814.57 ; v2@1566,3817 v2@1566,3814.57
  Bottom Layer w10: R5.2@1051.31,2596.84 1123.16,2596.84 v2(1126,2594) ; Q1.11@1565,3356.64 1565,3809 v2(1566,3810)
NetQ1_13: Q1.13 R8.2 | length 998.7
  Signal_1 w10: v2(1262,3645) 1302,3685 1635,3685 v2(1662,3712)
  Bottom Layer w10: R8.2@1051.31,3636.25 1253.25,3636.25 v2(1262,3645) ; v2(1662,3712) 1665,3709 Q1.13@1665,3356.64
NetQ1_15: Q1.15 R11.2 | length 1202.7
  Signal_1 w10: v2(1274,3492) 1274,3561 1369,3656 v2(1766,3656)
  Bottom Layer w10: R11.2@1050.18,3301.84 1083.84,3301.84 v2(1274,3492) ; Q1.15@1765,3356.64 1766,3357.64 v2(1766,3656)
NetR25_1: R25.1 T1.mb T2.mb U3.1 | length 149.5
  Top Layer w10: 2212,1588 2230,1588 v2(2262,1620)
  Bottom Layer w10: U3.1@2225.39,1691.11 2225.39,1656.61 v2(2262,1620)
  other v1: 2109,1398 2137.8,1398 2166.6,1398 2195.4,1398 2224.2,1398 2253,1398 1859,1399 1887.8,1399 1916.6,1399 1945.4,1399 1974.2,1399 2003,1399 2109,1424 2137.8,1424 2166.6,1424 2195.4,1424 2224.2,1424 2253,1424 1859,1425 1887.8,1425 1916.6,1425 1945.4,1425 1974.2,1425 2003,1425 2109,1450 2137.8,1450 2166.6,1450 2195.4,1450 2224.2,1450 2253,1450 1859,1451 1887.8,1451 1916.6,1451 1945.4,1451 1974.2,1451 2003,1451 2109,1476 2137.8,1476 2166.6,1476 2195.4,1476 2224.2,1476 2253,1476 1859,1477 1887.8,1477 1916.6,1477 1945.4,1477 1974.2,1477 2003,1477 2109,1502 2137.8,1502 2166.6,1502 2195.4,1502 2224.2,1502 2253,1502 1859,1503 1887.8,1503 1916.6,1503 1945.4,1503 1974.2,1503 2003,1503 2109,1528 2137.8,1528 2166.6,1528 2195.4,1528 2224.2,1528 2253,1528 1859,1529 1887.8,1529 1916.6,1529 1945.4,1529 1974.2,1529 2003,1529 2109,1554 2137.8,1554 2166.6,1554 2195.4,1554 2224.2,1554 2253,1554 1859,1555 1887.8,1555 1916.6,1555 1945.4,1555 1974.2,1555 2003,1555
NetR28_1: R28.1 T3.mb T4.mb U4.1 | length 125.1
  Top Layer w10: 1715,1596 1718,1596 v2(1754,1632)
  Bottom Layer w10: U4.1@1727.91,1692.41 1727.91,1658.09 v2(1754,1632)
  other v1: 1610,1398 1638.8,1398 1667.6,1398 1696.4,1398 1725.2,1398 1754,1398 1362,1400 1390.8,1400 1419.6,1400 1448.4,1400 1477.2,1400 1506,1400 1610,1424 1638.8,1424 1667.6,1424 1696.4,1424 1725.2,1424 1754,1424 1362,1426 1390.8,1426 1419.6,1426 1448.4,1426 1477.2,1426 1506,1426 1610,1450 1638.8,1450 1667.6,1450 1696.4,1450 1725.2,1450 1754,1450 1362,1452 1390.8,1452 1419.6,1452 1448.4,1452 1477.2,1452 1506,1452 1610,1476 1638.8,1476 1667.6,1476 1696.4,1476 1725.2,1476 1754,1476 1362,1478 1390.8,1478 1419.6,1478 1448.4,1478 1477.2,1478 1506,1478 1610,1502 1638.8,1502 1667.6,1502 1696.4,1502 1725.2,1502 1754,1502 1362,1504 1390.8,1504 1419.6,1504 1448.4,1504 1477.2,1504 1506,1504 1610,1528 1638.8,1528 1667.6,1528 1696.4,1528 1725.2,1528 1754,1528 1362,1530 1390.8,1530 1419.6,1530 1448.4,1530 1477.2,1530 1506,1530 1610,1554 1638.8,1554 1667.6,1554 1696.4,1554 1725.2,1554 1754,1554 1362,1556 1390.8,1556 1419.6,1556 1448.4,1556 1477.2,1556 1506,1556
NetR31_1: R31.1 T5.mb T6.mb U5.1@1453.82,2372.89 | length 119.9
  Bottom Layer w10: v2(1414,2464) 1435,2464 1453.82,2445.18 U5.1@1453.82,2372.89
  other v1: 1614,2510 1642.8,2510 1671.6,2510 1700.4,2510 1729.2,2510 1758,2510 1365,2511 1393.8,2511 1422.6,2511 1451.4,2511 1480.2,2511 1509,2511 1614,2536 1642.8,2536 1671.6,2536 1700.4,2536 1729.2,2536 1758,2536 1365,2537 1393.8,2537 1422.6,2537 1451.4,2537 1480.2,2537 1509,2537 1614,2562 1642.8,2562 1671.6,2562 1700.4,2562 1729.2,2562 1758,2562 1365,2563 1393.8,2563 1422.6,2563 1451.4,2563 1480.2,2563 1509,2563 1614,2588 1642.8,2588 1671.6,2588 1700.4,2588 1729.2,2588 1758,2588 1365,2589 1393.8,2589 1422.6,2589 1451.4,2589 1480.2,2589 1509,2589 1614,2614 1642.8,2614 1671.6,2614 1700.4,2614 1729.2,2614 1758,2614 1365,2615 1393.8,2615 1422.6,2615 1451.4,2615 1480.2,2615 1509,2615 1614,2640 1642.8,2640 1671.6,2640 1700.4,2640 1729.2,2640 1758,2640 1365,2641 1393.8,2641 1422.6,2641 1451.4,2641 1480.2,2641 1509,2641 1614,2666 1642.8,2666 1671.6,2666 1700.4,2666 1729.2,2666 1758,2666 1365,2667 1393.8,2667 1422.6,2667 1451.4,2667 1480.2,2667 1509,2667
NetR34_1: R34.1 T7.mb T8.mb U6.1 | length 62
  Bottom Layer w10: v2(1953,2434) 1955.26,2431.74 U6.1@1955.26,2372.89
  other v1: 2114,2509 2142.8,2509 2171.6,2509 2200.4,2509 2229.2,2509 2258,2509 1867,2510 1895.8,2510 1924.6,2510 1953.4,2510 1982.2,2510 2011,2510 2114,2535 2142.8,2535 2171.6,2535 2200.4,2535 2229.2,2535 2258,2535 1867,2536 1895.8,2536 1924.6,2536 1953.4,2536 1982.2,2536 2011,2536 2114,2561 2142.8,2561 2171.6,2561 2200.4,2561 2229.2,2561 2258,2561 1867,2562 1895.8,2562 1924.6,2562 1953.4,2562 1982.2,2562 2011,2562 2114,2587 2142.8,2587 2171.6,2587 2200.4,2587 2229.2,2587 2258,2587 1867,2588 1895.8,2588 1924.6,2588 1953.4,2588 1982.2,2588 2011,2588 2114,2613 2142.8,2613 2171.6,2613 2200.4,2613 2229.2,2613 2258,2613 1867,2614 1895.8,2614 1924.6,2614 1953.4,2614 1982.2,2614 2011,2614 2114,2639 2142.8,2639 2171.6,2639 2200.4,2639 2229.2,2639 2258,2639 1867,2640 1895.8,2640 1924.6,2640 1953.4,2640 1982.2,2640 2011,2640 2114,2665 2142.8,2665 2171.6,2665 2200.4,2665 2229.2,2665 2258,2665 1867,2666 1895.8,2666 1924.6,2666 1953.4,2666 1982.2,2666 2011,2666
NetR64_2: R64.2 U8.3 | length 222.9
  Top Layer w10: U8.3@1784.34,608.28 1784.34,592.66 1839,538 1966.9,538 R64.2@1968.34,539.45
NetR68_1: R68.1 U10.1 UART_TX1.1
NetR69_1: R69.1 U10.5 UART_RX1.1
NetTEST_CANRX1_1: TEST_CANRX1.1 U1.4 U2.6
NetTEST_CANTX1_1: TEST_CANTX1.1 U1.1 U2.5
NetU2_17: U2.17
NetU2_18: U2.18
NetU2_35: U2.35
NetU2_39: U2.39
NetU2_44: U2.44
RECTIFIER_IN: M1.mb M2.mb M3.mb X1.B17 X1.B24
  other v1: 997,368.52 1023,368.52 1049,368.52 1075,368.52 1101,368.52 1127,368.52 1153,368.52 1245.4,368.52 1271.4,368.52 1297.4,368.52 1323.4,368.52 1349.4,368.52 1375.4,368.52 1401.4,368.52 1493.79,369.52 1519.79,369.52 1545.79,369.52 1571.79,369.52 1597.79,369.52 1623.79,369.52 1649.79,369.52 997,397.32 1023,397.32 1049,397.32 1075,397.32 1101,397.32 1127,397.32 1153,397.32 1245.4,397.32 1271.4,397.32 1297.4,397.32 1323.4,397.32 1349.4,397.32 1375.4,397.32 1401.4,397.32 1493.79,398.32 1519.79,398.32 1545.79,398.32 1571.79,398.32 1597.79,398.32 1623.79,398.32 1649.79,398.32 997,426.12 1023,426.12 1049,426.12 1075,426.12 1101,426.12 1127,426.12 1153,426.12 1245.4,426.12 1271.4,426.12 1297.4,426.12 1323.4,426.12 1349.4,426.12 1375.4,426.12 1401.4,426.12 1493.79,427.12 1519.79,427.12 1545.79,427.12 1571.79,427.12 1597.79,427.12 1623.79,427.12 1649.79,427.12 997,454.92 1023,454.92 1049,454.92 1075,454.92 1101,454.92 1127,454.92 1153,454.92 1245.4,454.92 1271.4,454.92 1297.4,454.92 1323.4,454.92 1349.4,454.92 1375.4,454.92 1401.4,454.92 1493.79,455.92 1519.79,455.92 1545.79,455.92 1571.79,455.92 1597.79,455.92 1623.79,455.92 1649.79,455.92 997,483.72 1023,483.72 1049,483.72 1075,483.72 1101,483.72 1127,483.72 1153,483.72 1245.4,483.72 1271.4,483.72 1297.4,483.72 1323.4,483.72 1349.4,483.72 1375.4,483.72 1401.4,483.72 1493.79,484.72 1519.79,484.72 1545.79,484.72 1571.79,484.72 1597.79,484.72 1623.79,484.72 1649.79,484.72 997,512.52 1023,512.52 1049,512.52 1075,512.52 1101,512.52 1127,512.52 1153,512.52 1245.4,512.52 1271.4,512.52 1297.4,512.52 1323.4,512.52 1349.4,512.52 1375.4,512.52 1401.4,512.52 1493.79,513.52 1519.79,513.52 1545.79,513.52 1571.79,513.52 1597.79,513.52 1623.79,513.52 1649.79,513.52
RECTIFIER_OUT: M1.1 M1.2 M1.3 M2.1 M2.2 M2.3 M3.1 M3.2 M3.3 X1.B18 X1.B25 | length 122.9
  Top Layer w60: X1.B25@405.91,1108.27 453.42,1155.78 492.79,1155.78 X1.B18@504.33,1167.32
Relay_Sig_HC_1: R22.2 X1.A27 | length 421.6
  Signal_2 w10: v2(75,3023) 332.45,3023 X1.A27@405.91,3096.46
  Bottom Layer w10: v2(75,3023) 76,3024 R22.2@76,3082.82
Relay_Sig_HC_2: R19.2 X1.A19 | length 194.2
  Bottom Layer w10: R19.2@312,3039.41 313.26,3038.15 430.06,3038.15 431.32,3039.41 502.32,3039.41 X1.A19@504.33,3037.4
Relay_Sig_LC: R21.2 X1.A28 | length 474.8
  Signal_1 w10: v2(253,2761) 253,2825.44 X1.A28@405.91,2978.35
  Bottom Layer w10: R21.2@75.83,2727.59 75.83,2732.9 224.9,2732.9 v2(253,2761)
SCK: DAC1.9 U2.32
SPLIT: C2.2 R13.2 R14.1 U1.5 | length 119.1
  Bottom Layer w10: U1.5@921.72,3835 934.76,3835 941.06,3828.71 941.06,3826.6 992.74,3774.91 994.71,3774.91 1007.43,3762.19 C2.2@1007.43,3760.23
STBY: R15.2 U1.8
TEMP_SENSE: U2.4 U9.2
VCC: C1.2 U1.3
VCC_3V3: C26.2 U10.17
pads on no net: IC6.2 IC6.4 IC6.6 IC6.8 IC7.2 IC7.4 IC7.6 IC7.8 IC8.2 IC8.4 IC8.6 IC8.8 IC9.6 IC10.6 IC11.6 IC12.6 IC13.6 IC14.6 IC15.6 IC16.6 IC17.1 IC17.3 IC17.5 IC17.7 IC17.8 J1.4 J1.6 J1.7 J1.8 J1.9 J1.10 J1.11 P1.7 P1.9 P1.MH1 P1.MH2 U5.5@4584.43,800.39 U5.6@4719.87,559.24 U5.hole U8.2 U8.7 U10.3 U10.6 U10.8 U10.9 U10.10 U10.11 U10.12 U10.13 U10.14 U10.24 U10.27 U10.28 X1.B3 X1.B4 X1.CH X1.LH X1.RH

## Polygon pours and split planes (outlines as drawn)
HC_3_OUTPUT on Top Layer "Top Layer-HC_2_OUTPUT" (solid, pour order 28): 1383.08,1353.6 1783.08,1353.6 1783.08,1266.6 1681.48,1165 666,1165 666,1291.6 1382.08,1291.6
NetR31_1 on Top Layer "Top Layer-NetR31_1" (solid, pour order 62): 1337,2688 1784,2688 1784,2511 1633,2360 1488,2360 1337,2511
HC_1_OUTPUT on Top Layer "Top Layer-HC_1_OUTPUT" (solid, pour order 6): 1888,2717 2286,2717 2286,2863 1941,3208 720,3208 536,3024 580,2980 580,2963 647,2963 713,3029 1561,3029 1813,2777 1888,2777
RECTIFIER_OUT on Top Layer "Top Layer-RECTIFIER_OUT" (solid, pour order 78): 1690,565.02 1690,757 539,757 311,985 373,1047 490,1047 620,1177 564.68,1232.32 385.32,1232.32 130,977 131,976 131,875 446,560
no net on Top Layer "Top Layer-No Net" (solid, pour order 70): 2318,2379
NetR25_1 on Top Layer "Top Layer-NetR25_1" (solid, pour order 68): 1834,1376 2281,1376 2281,1553 2130,1704 1985,1704 1834,1553
NetR28_1 on Top Layer "Top Layer-NetR28_1" (solid, pour order 66): 1336.52,1377.3 1783.52,1377.3 1783.52,1554.3 1632.52,1705.3 1487.52,1705.3 1336.52,1554.3
NetR34_1 on Top Layer "Top Layer-NetR34_1" (solid, pour order 64): 1838.44,2688 2285.44,2688 2285.44,2511 2134.44,2360 1989.44,2360 1838.44,2511
NetIC9_1 on Top Layer "Top Layer-NetIC9_1" (solid, pour order 58): 3456.88,2753.11 3456.88,2551.11 3650.88,2551.11 3796.88,2551.11 3796.88,2642.11 3686.88,2752.11 3627.88,2752.11
NetIC11_1 on Top Layer "Top Layer-NetIC11_1" (solid, pour order 56): 3069.91,2751.89 3069.91,2549.89 3263.91,2549.89 3409.91,2549.89 3409.91,2640.89 3299.91,2750.89 3240.91,2750.89
NetIC10_1 on Top Layer "Top Layer-NetIC10_1" (solid, pour order 54): 2702.49,2752 2702.49,2550 2896.49,2550 3042.49,2550 3042.49,2641 2932.49,2751 2873.49,2751
NetIC12_1 on Top Layer "Top Layer-NetIC12_1" (solid, pour order 52): 2335.07,2752.47 2335.07,2550.47 2529.07,2550.47 2675.07,2550.47 2675.07,2641.47 2565.07,2751.47 2506.07,2751.47
NetIC14_1 on Top Layer "Top Layer-NetIC14_1" (solid, pour order 50): 3751.26,1292 3751.26,1494 3557.26,1494 3411.26,1494 3411.26,1403 3521.26,1293 3580.26,1293
NetIC13_1 on Top Layer "Top Layer-NetIC13_1" (solid, pour order 48): 3383.84,1292 3383.84,1494 3189.84,1494 3043.84,1494 3043.84,1403 3153.84,1293 3212.84,1293
NetIC16_1 on Top Layer "Top Layer-NetIC16_1" (solid, pour order 46): 3016.42,1292 3016.42,1494 2822.42,1494 2676.42,1494 2676.42,1403 2786.42,1293 2845.42,1293
NetIC15_1 on Top Layer "Top Layer-NetIC15_1" (solid, pour order 44): 2649,1292 2649,1494 2455,1494 2309,1494 2309,1403 2419,1293 2478,1293
+12 on Top Layer "Top Layer-+12" (solid, pour order 26): 1309,1737 4018,1737 4018,2301 3994,2325 1309,2325
LC_6_OUTPUT on Top Layer "Top Layer-LC_6_OUTPUT" (solid, pour order 12): 3267.84,2781.7 3267.66,2781.52 3121.84,2781.52 3121.84,2851.42 3113.84,2859.42 3113.84,2898.42 3122.84,2907.42 3235.84,2907.42 3267.84,2875.42
LC_1_OUTPUT on Top Layer "Top Layer-LC_1_OUTPUT" (solid, pour order 20): 2963.95,1262.19 2963.77,1262.37 2817.95,1262.37 2817.95,1192.47 2809.95,1184.47 2809.95,1145.47 2818.95,1136.47 2931.95,1136.47 2963.95,1168.47
LC_2_OUTPUT on Top Layer "Top Layer-LC_2_OUTPUT" (solid, pour order 18): 2596.53,1262.19 2596.35,1262.37 2450.53,1262.37 2450.53,1192.47 2442.53,1184.47 2442.53,1145.47 2451.53,1136.47 2564.53,1136.47 2596.53,1168.47
12V_IN on Top Layer "Top Layer-12V_IN" (solid, pour order 42): 1012.57,1733 1012,1733.57 1012,2315 901,2315 766,2450 628,2450 563,2385 563,1529 762,1529 943.79,1710.79
LC_8_OUTPUT on Top Layer "Top Layer-LC_8_OUTPUT" (solid, pour order 14): 3654.81,2782.92 3654.63,2782.73 3508.81,2782.73 3508.81,2852.64 3500.81,2860.64 3500.81,2899.64 3509.81,2908.64 3622.81,2908.64 3654.81,2876.64
HC_2_OUTPUT on Top Layer "Top Layer-HC_2_OUTPUT" (solid, pour order 4): 1385,2713 1785,2713 1785,2800 1556,3029 688,3029 648,2989 648,2804 1355,2804 1384,2775
LC_3_OUTPUT on Top Layer "Top Layer-LC_3_OUTPUT" (solid, pour order 24): 3698.79,1262.19 3698.61,1262.37 3552.79,1262.37 3552.79,1192.47 3544.79,1184.47 3544.79,1145.47 3553.79,1136.47 3666.79,1136.47 3698.79,1168.47
LC_4_OUTPUT on Top Layer "Top Layer-LC_4_OUTPUT" (solid, pour order 22): 3331.37,1262.19 3331.19,1262.37 3185.37,1262.37 3185.37,1192.47 3177.37,1184.47 3177.37,1145.47 3186.37,1136.47 3299.37,1136.47 3331.37,1168.47
LC_7_OUTPUT on Top Layer "Top Layer-LC_7_OUTPUT" (solid, pour order 10): 2900.42,2781.81 2900.24,2781.63 2754.42,2781.63 2754.42,2851.53 2746.42,2859.53 2746.42,2898.53 2755.42,2907.53 2868.42,2907.53 2900.42,2875.53
LC_5_OUTPUT on Top Layer "Top Layer-LC_5_OUTPUT" (solid, pour order 8): 2533,2782.28 2532.82,2782.1 2387,2782.1 2387,2852 2379,2860 2379,2899 2388,2908 2501,2908 2533,2876
HC_4_OUTPUT on Top Layer "Top Layer-HC_1_OUTPUT" (solid, pour order 30): 1882.12,1348.3 2280.12,1348.3 2280.12,1202.3 2119.12,1041.3 708,1041.3 575,1202.3 600.71,1245.29 691.41,1154.59 1673.41,1154.59 1807.12,1288.3 1882.12,1288.3
no net on Bottom Layer "Bottom Layer-No Net 3" (solid, pour order 76): 1929,556
no net on Bottom Layer "Bottom Layer-No Net 2" (solid, pour order 60): 1337,2688
RECTIFIER_IN on Bottom Layer "Bottom Layer-RECTIFIER_IN" (solid, pour order 40): 779.44,461.25 639.94,499.06 305.92,833.08
RECTIFIER_IN on Bottom Layer "Bottom Layer-RECTIFIER_IN 1" (solid, pour order 38): 803,342 468.5,468.5 139,834 139,1110 381,1352 559,1352 559,1254 464,1159 362,1159 362,1156 323,1117 323,897
no net on Bottom Layer "Bottom Layer-No Net" (solid, pour order 36): 1356,237
RECTIFIER_IN on Bottom Layer "Bottom Layer-RECTIFIER_IN 2" (solid, pour order 34): 1688,539.5 1688,341.23 795.93,342.02 657,488 657,537.31
no net on Bottom Layer "Bottom Layer-No Net 1" (solid, pour order 32): 1932,537

## Text inside footprints (layer, text, board x,y; h text height)
D9: Top Overlay "*" at 4171.43,3543 h60
D10: Top Overlay "*" at 4378.28,3850 h60
LED1: Top Overlay "*" at 4703,2320.09 h60
LED2: Bottom Overlay "*" at 4171.18,2394.69 h60 r180
X1: Top Overlay "SUPER SEAL 60POS" at 860,3360 h60 r270